# Altium PCB 74HC595_update.PcbDoc (part 1 of 2)
Units mil, origin at the board's own origin, x right, y up, seen from the top; angles counter-clockwise.
Board outline 2530 x 3200 mil, 2 copper layers (Top Layer, Bottom Layer); 370 components, 74 nets, 1020 pads, 340 vias.
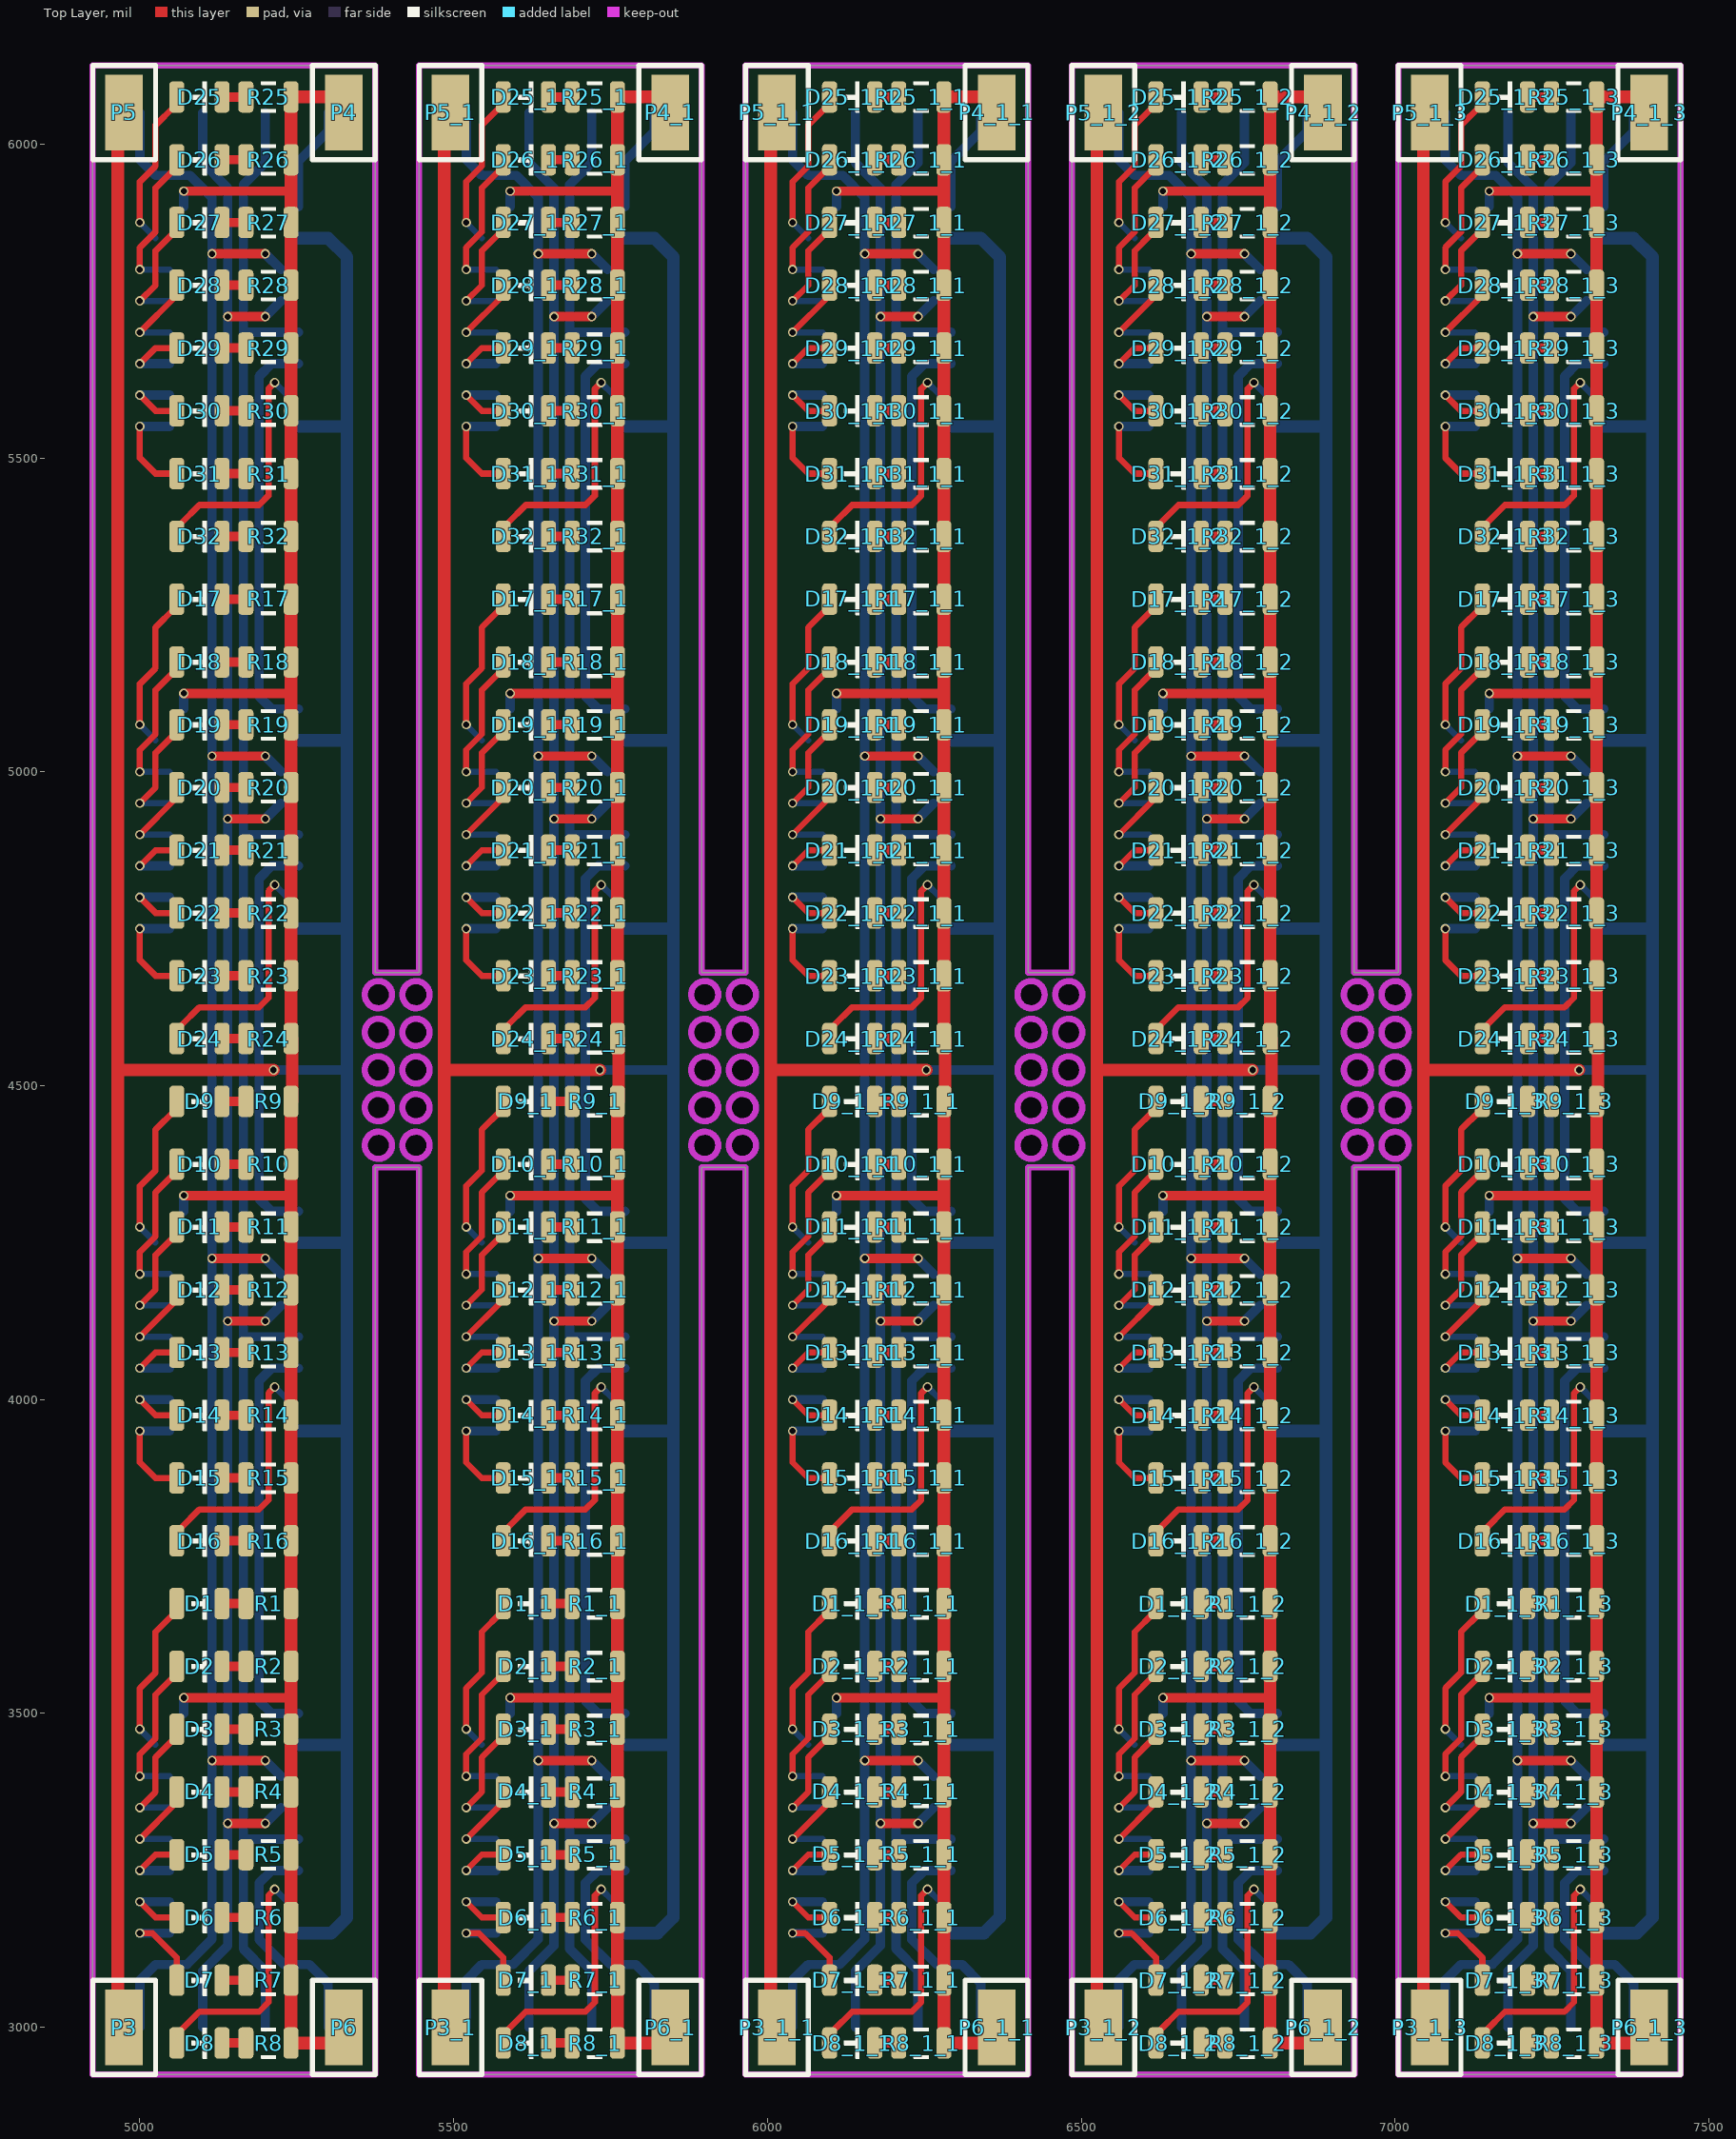
[diagram p0: Top Layer view]
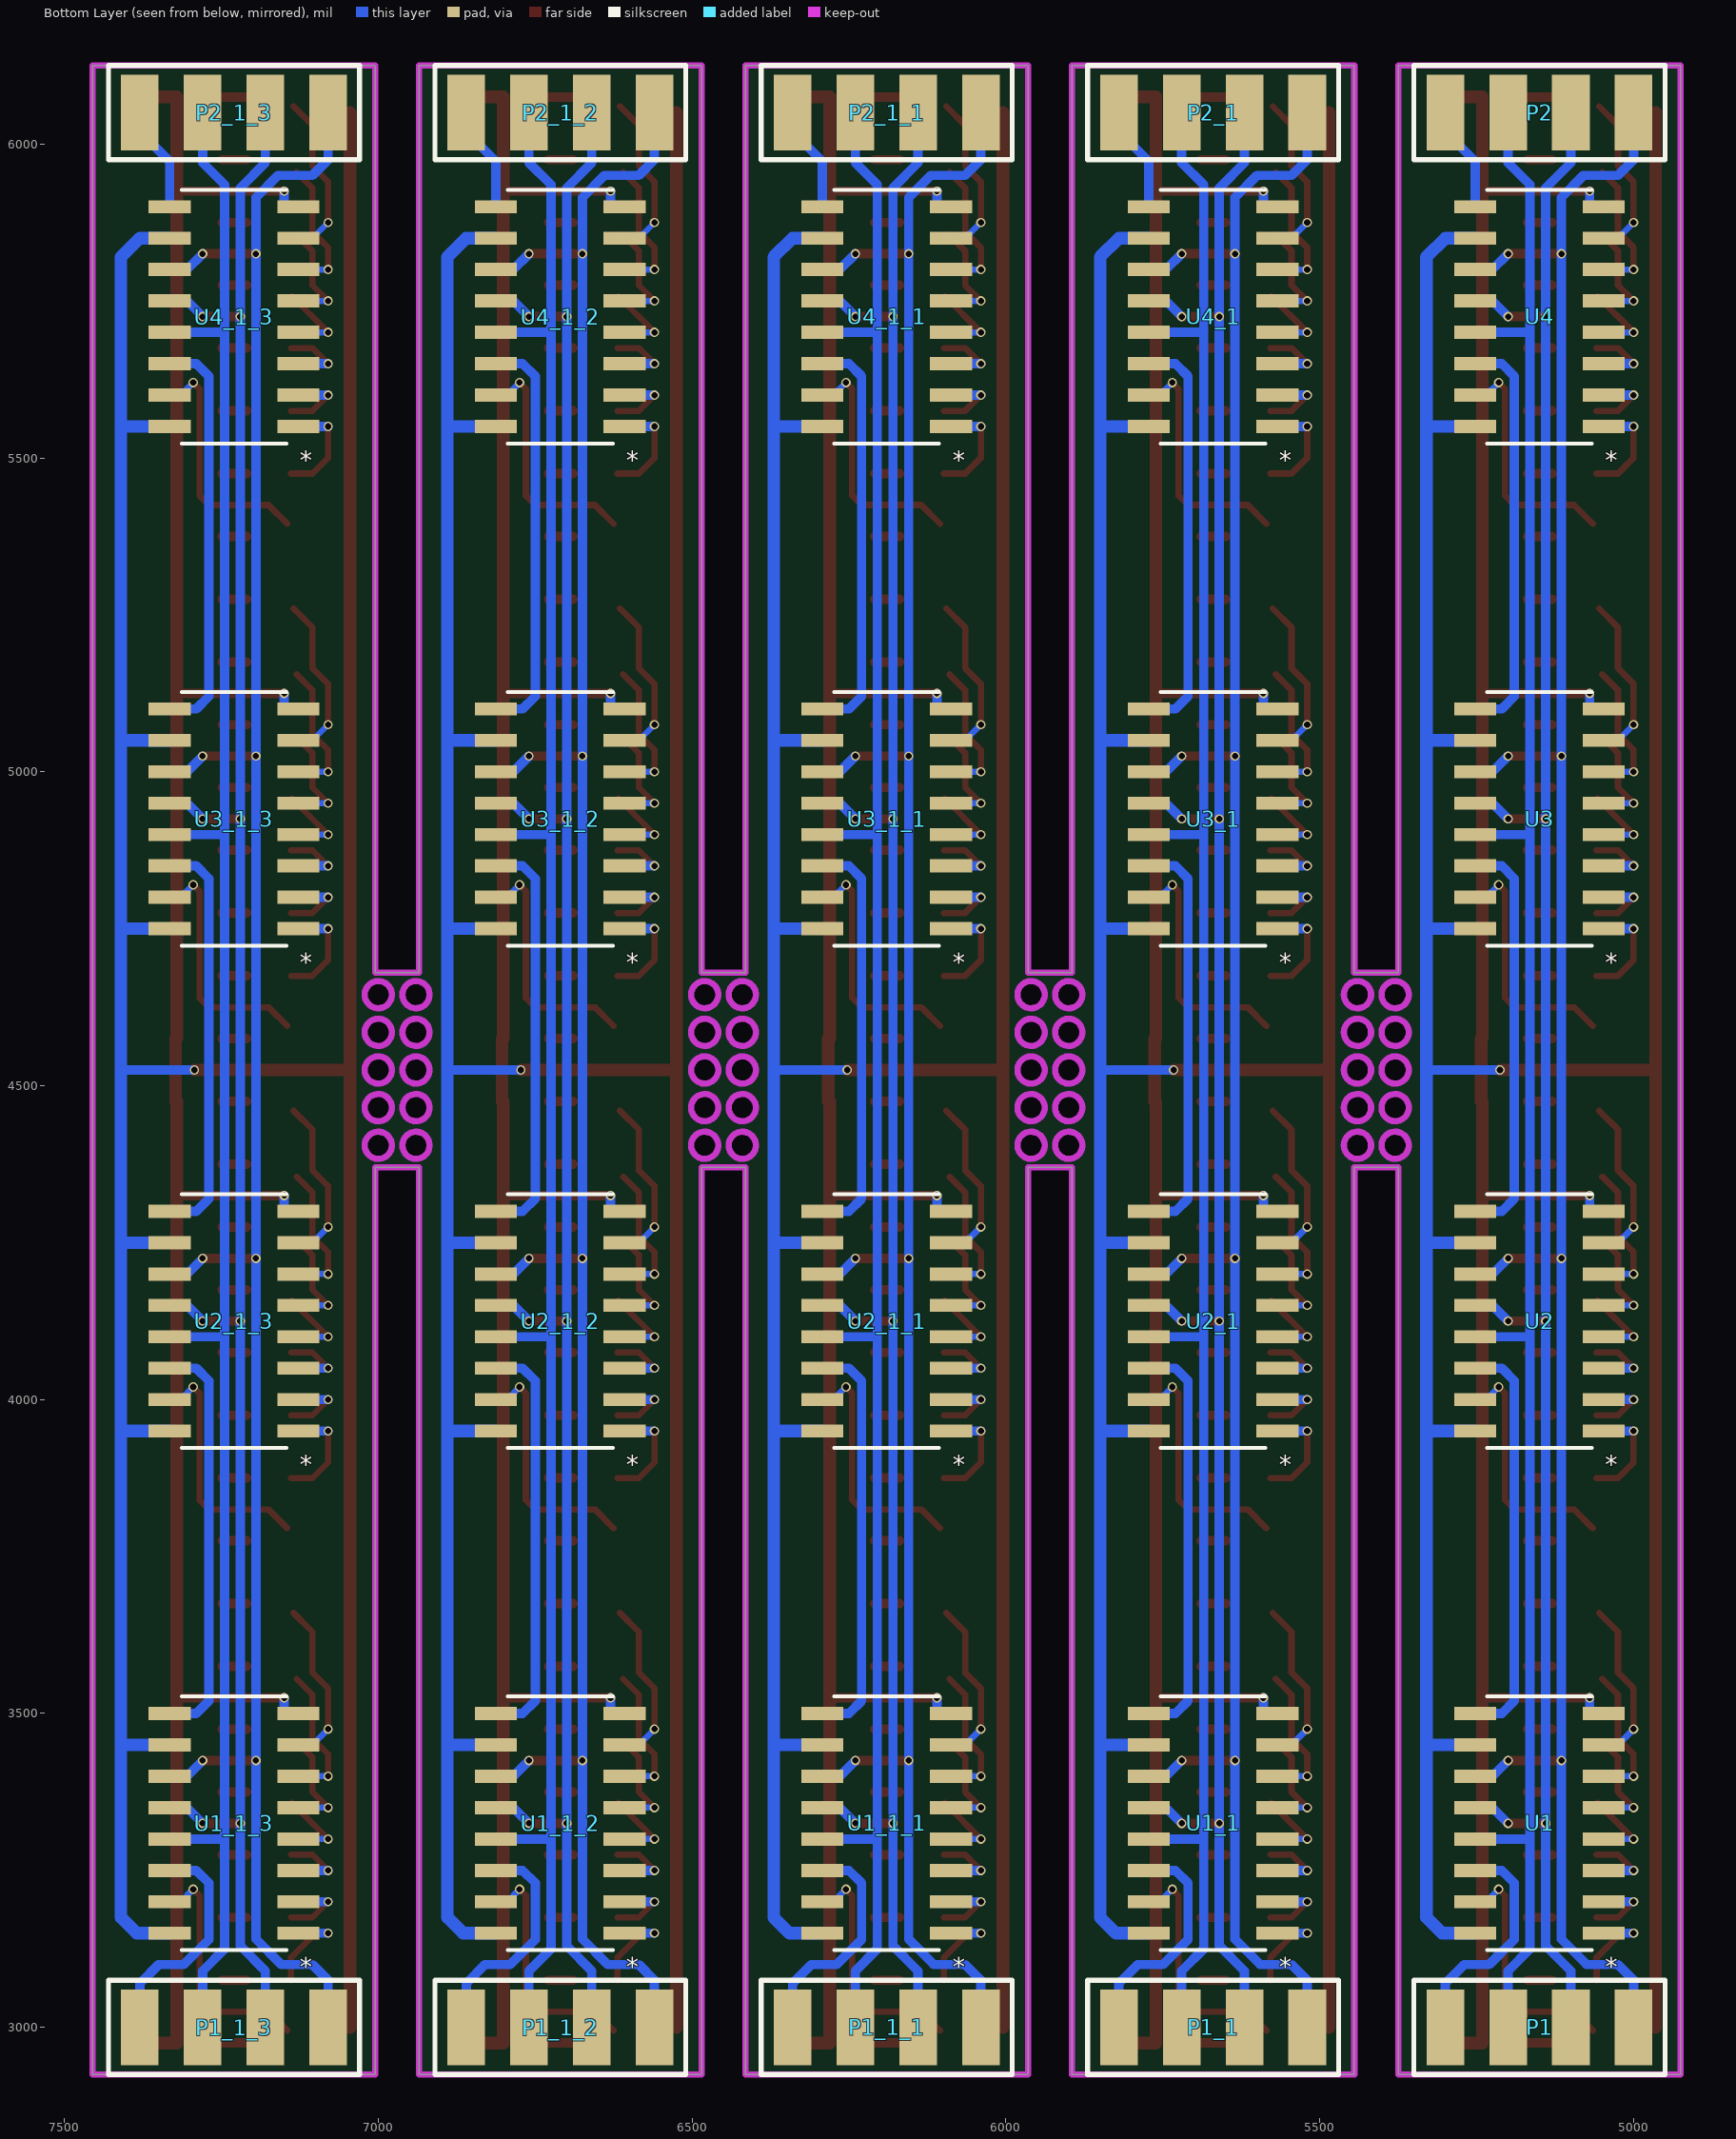
[diagram p1: Bottom Layer view, seen from below]
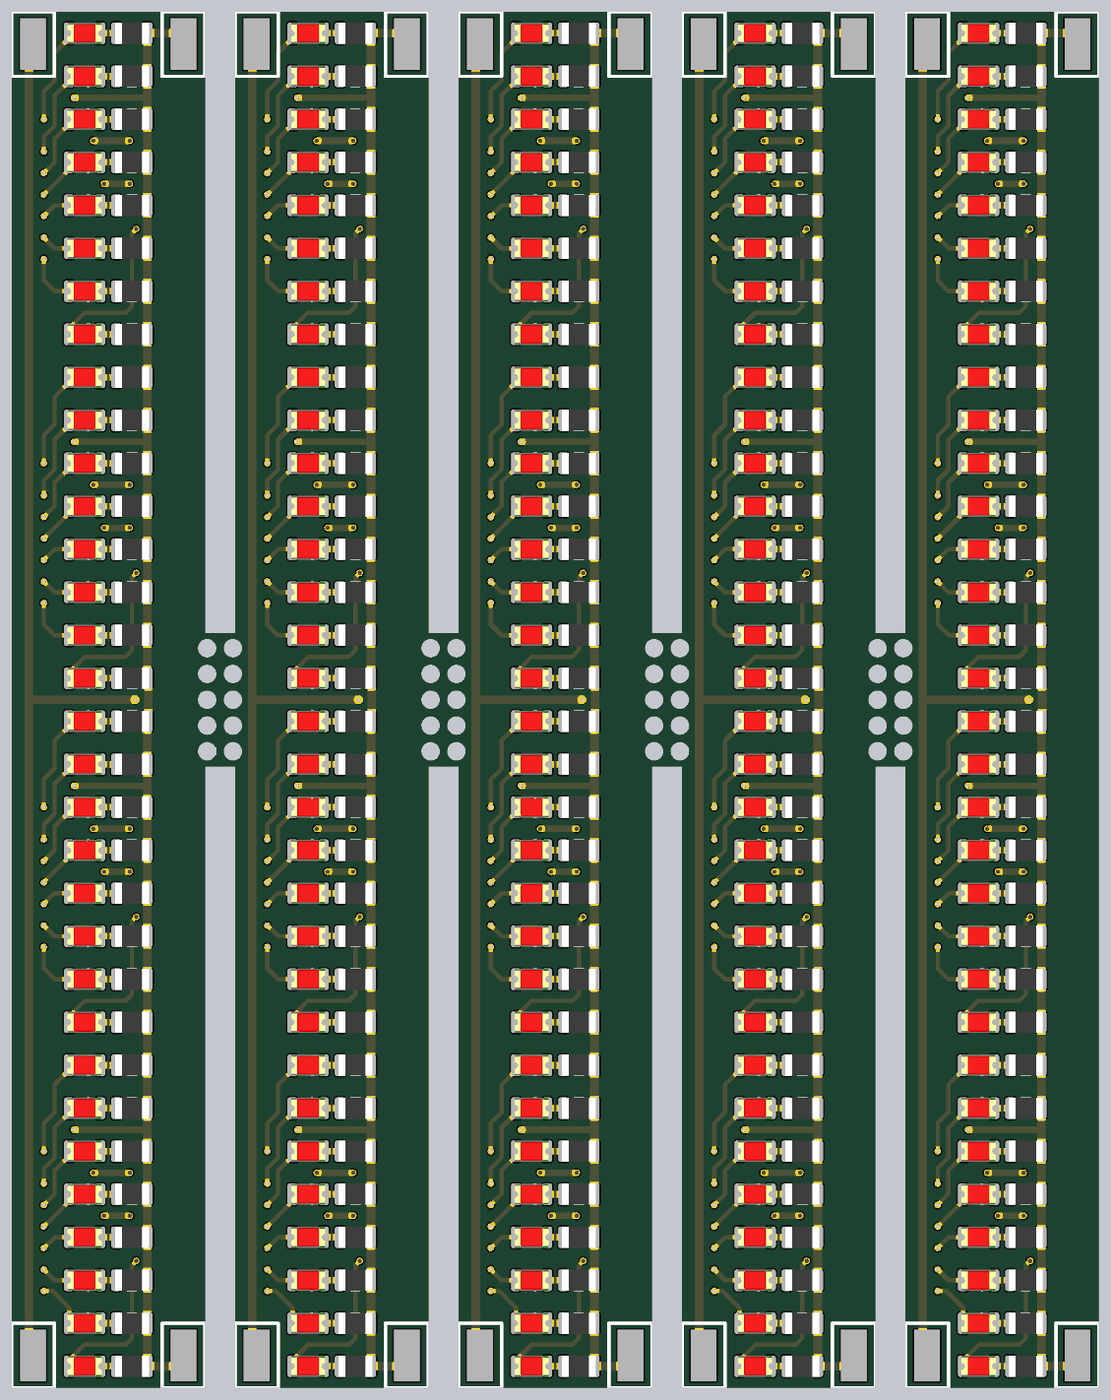
[diagram p3: 3D render of the assembled board from above, using the file's embedded part models]
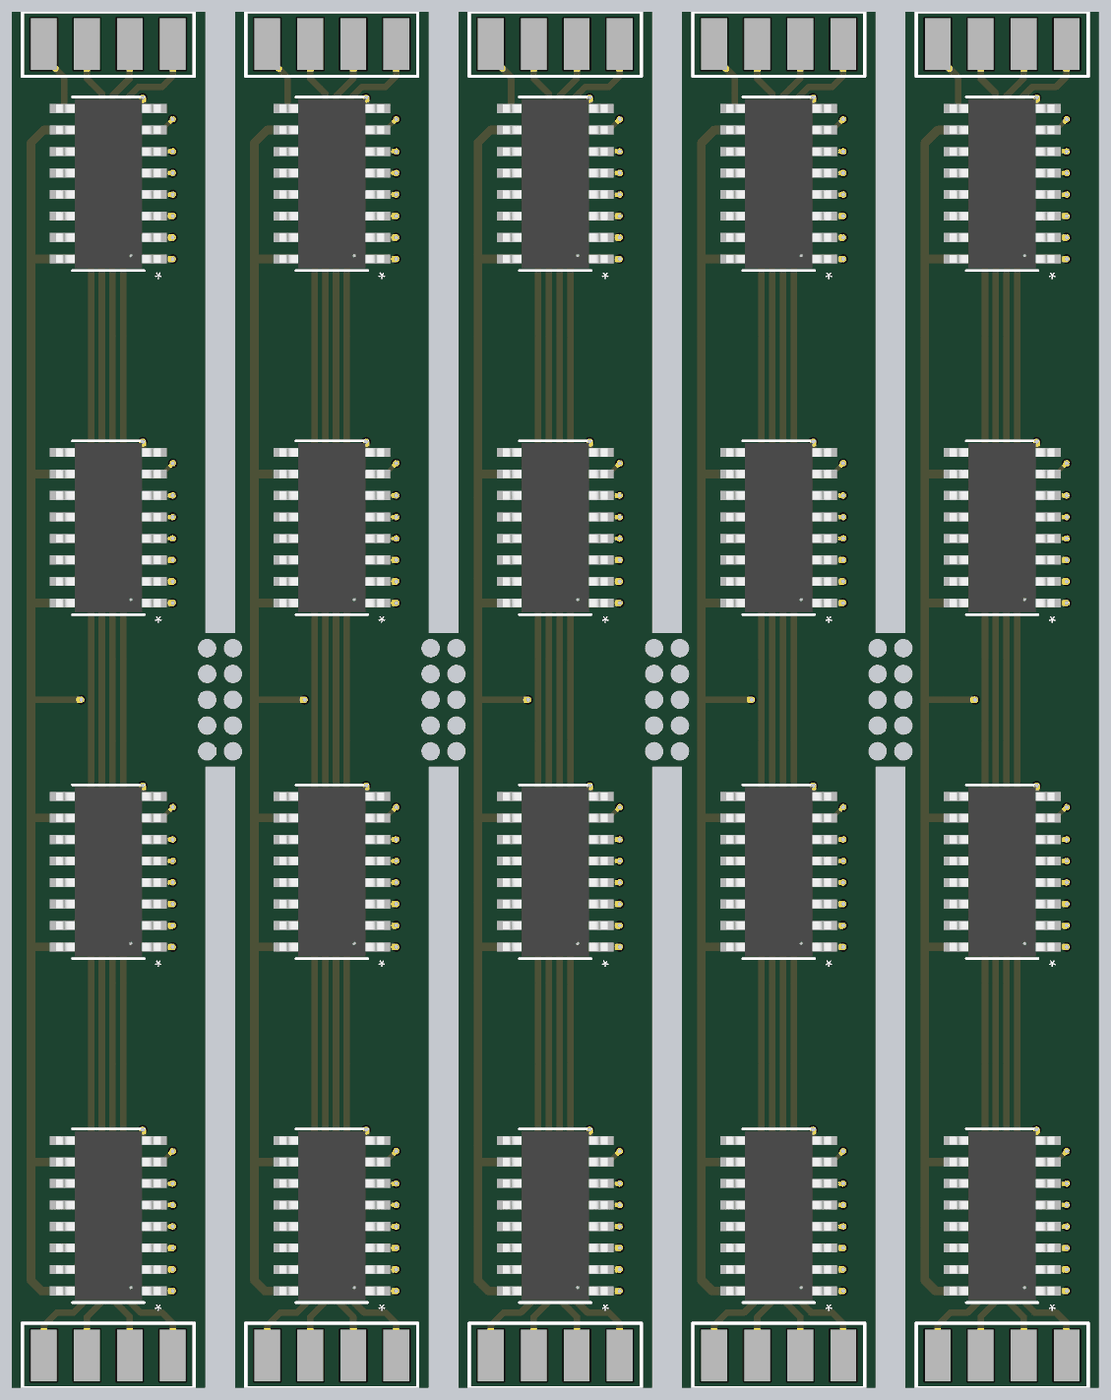
[diagram p4: 3D render of the assembled board from below, using the file's embedded part models]

## Layer stack, top to bottom
Top Solder: solder mask 0.4, Solder Resist, Dk 3.5
Top Layer: signal copper 1.4
Dielectric 1: dielectric 12.6, FR-4, Dk 4.8
Bottom Layer: signal copper 1.4
Bottom Solder: solder mask 0.4, Solder Resist, Dk 3.5

## Board outline
4925,2925 5375,2925 5375,4370 5445,4370 5445,2925 5895,2925 5895,4370 5965,4370 5965,2925 6415,2925 6415,4370 6485,4370 6485,2925 6935,2925 6935,4370 7005,4370 7005,2925 7455,2925 7455,6125 7005,6125 7005,4680 6935,4680 6935,6125 6485,6125 6485,4680 6415,4680 6415,6125 5965,6125 5965,4680 5895,4680 5895,6125 5445,6125 5445,4680 5375,4680 5375,6125 4925,6125
cut-out: 6918.35,4405 ccw(c6940,4405) 6940,4383.35 ccw(c6940,4405) 6961.65,4405 ccw(c6940,4405) 6940,4426.65 ccw(c6940,4405)
cut-out: 6918.35,4465 ccw(c6940,4465) 6940,4443.35 ccw(c6940,4465) 6961.65,4465 ccw(c6940,4465) 6940,4486.65 ccw(c6940,4465)
cut-out: 6918.35,4525 ccw(c6940,4525) 6940,4503.35 ccw(c6940,4525) 6961.65,4525 ccw(c6940,4525) 6940,4546.65 ccw(c6940,4525)
cut-out: 6918.35,4585 ccw(c6940,4585) 6940,4563.35 ccw(c6940,4585) 6961.65,4585 ccw(c6940,4585) 6940,4606.65 ccw(c6940,4585)
cut-out: 6918.35,4645 ccw(c6940,4645) 6940,4623.35 ccw(c6940,4645) 6961.65,4645 ccw(c6940,4645) 6940,4666.65 ccw(c6940,4645)
cut-out: 6398.35,4405 ccw(c6420,4405) 6420,4383.35 ccw(c6420,4405) 6441.65,4405 ccw(c6420,4405) 6420,4426.65 ccw(c6420,4405)
cut-out: 6398.35,4465 ccw(c6420,4465) 6420,4443.35 ccw(c6420,4465) 6441.65,4465 ccw(c6420,4465) 6420,4486.65 ccw(c6420,4465)
cut-out: 6398.35,4525 ccw(c6420,4525) 6420,4503.35 ccw(c6420,4525) 6441.65,4525 ccw(c6420,4525) 6420,4546.65 ccw(c6420,4525)
cut-out: 6398.35,4585 ccw(c6420,4585) 6420,4563.35 ccw(c6420,4585) 6441.65,4585 ccw(c6420,4585) 6420,4606.65 ccw(c6420,4585)
cut-out: 6398.35,4645 ccw(c6420,4645) 6420,4623.35 ccw(c6420,4645) 6441.65,4645 ccw(c6420,4645) 6420,4666.65 ccw(c6420,4645)
cut-out: 5878.35,4405 ccw(c5900,4405) 5900,4383.35 ccw(c5900,4405) 5921.65,4405 ccw(c5900,4405) 5900,4426.65 ccw(c5900,4405)
cut-out: 5878.35,4465 ccw(c5900,4465) 5900,4443.35 ccw(c5900,4465) 5921.65,4465 ccw(c5900,4465) 5900,4486.65 ccw(c5900,4465)
cut-out: 5878.35,4525 ccw(c5900,4525) 5900,4503.35 ccw(c5900,4525) 5921.65,4525 ccw(c5900,4525) 5900,4546.65 ccw(c5900,4525)
cut-out: 5878.35,4585 ccw(c5900,4585) 5900,4563.35 ccw(c5900,4585) 5921.65,4585 ccw(c5900,4585) 5900,4606.65 ccw(c5900,4585)
cut-out: 5878.35,4645 ccw(c5900,4645) 5900,4623.35 ccw(c5900,4645) 5921.65,4645 ccw(c5900,4645) 5900,4666.65 ccw(c5900,4645)
cut-out: 6978.35,4645 ccw(c7000,4645) 7000,4623.35 ccw(c7000,4645) 7021.65,4645 ccw(c7000,4645) 7000,4666.65 ccw(c7000,4645)
cut-out: 6978.35,4585 ccw(c7000,4585) 7000,4563.35 ccw(c7000,4585) 7021.65,4585 ccw(c7000,4585) 7000,4606.65 ccw(c7000,4585)
cut-out: 6978.35,4525 ccw(c7000,4525) 7000,4503.35 ccw(c7000,4525) 7021.65,4525 ccw(c7000,4525) 7000,4546.65 ccw(c7000,4525)
cut-out: 6978.35,4465 ccw(c7000,4465) 7000,4443.35 ccw(c7000,4465) 7021.65,4465 ccw(c7000,4465) 7000,4486.65 ccw(c7000,4465)
cut-out: 6978.35,4405 ccw(c7000,4405) 7000,4383.35 ccw(c7000,4405) 7021.65,4405 ccw(c7000,4405) 7000,4426.65 ccw(c7000,4405)
cut-out: 6458.35,4645 ccw(c6480,4645) 6480,4623.35 ccw(c6480,4645) 6501.65,4645 ccw(c6480,4645) 6480,4666.65 ccw(c6480,4645)
cut-out: 6458.35,4585 ccw(c6480,4585) 6480,4563.35 ccw(c6480,4585) 6501.65,4585 ccw(c6480,4585) 6480,4606.65 ccw(c6480,4585)
cut-out: 6458.35,4525 ccw(c6480,4525) 6480,4503.35 ccw(c6480,4525) 6501.65,4525 ccw(c6480,4525) 6480,4546.65 ccw(c6480,4525)
cut-out: 6458.35,4465 ccw(c6480,4465) 6480,4443.35 ccw(c6480,4465) 6501.65,4465 ccw(c6480,4465) 6480,4486.65 ccw(c6480,4465)
cut-out: 6458.35,4405 ccw(c6480,4405) 6480,4383.35 ccw(c6480,4405) 6501.65,4405 ccw(c6480,4405) 6480,4426.65 ccw(c6480,4405)
cut-out: 5938.35,4645 ccw(c5960,4645) 5960,4623.35 ccw(c5960,4645) 5981.65,4645 ccw(c5960,4645) 5960,4666.65 ccw(c5960,4645)
cut-out: 5938.35,4585 ccw(c5960,4585) 5960,4563.35 ccw(c5960,4585) 5981.65,4585 ccw(c5960,4585) 5960,4606.65 ccw(c5960,4585)
cut-out: 5938.35,4525 ccw(c5960,4525) 5960,4503.35 ccw(c5960,4525) 5981.65,4525 ccw(c5960,4525) 5960,4546.65 ccw(c5960,4525)
cut-out: 5938.35,4465 ccw(c5960,4465) 5960,4443.35 ccw(c5960,4465) 5981.65,4465 ccw(c5960,4465) 5960,4486.65 ccw(c5960,4465)
cut-out: 5938.35,4405 ccw(c5960,4405) 5960,4383.35 ccw(c5960,4405) 5981.65,4405 ccw(c5960,4405) 5960,4426.65 ccw(c5960,4405)
cut-out: 5418.35,4405 ccw(c5440,4405) 5440,4383.35 ccw(c5440,4405) 5461.65,4405 ccw(c5440,4405) 5440,4426.65 ccw(c5440,4405)
cut-out: 5418.35,4465 ccw(c5440,4465) 5440,4443.35 ccw(c5440,4465) 5461.65,4465 ccw(c5440,4465) 5440,4486.65 ccw(c5440,4465)
cut-out: 5418.35,4525 ccw(c5440,4525) 5440,4503.35 ccw(c5440,4525) 5461.65,4525 ccw(c5440,4525) 5440,4546.65 ccw(c5440,4525)
cut-out: 5418.35,4585 ccw(c5440,4585) 5440,4563.35 ccw(c5440,4585) 5461.65,4585 ccw(c5440,4585) 5440,4606.65 ccw(c5440,4585)
cut-out: 5418.35,4645 ccw(c5440,4645) 5440,4623.35 ccw(c5440,4645) 5461.65,4645 ccw(c5440,4645) 5440,4666.65 ccw(c5440,4645)
cut-out: 5358.35,4405 ccw(c5380,4405) 5380,4383.35 ccw(c5380,4405) 5401.65,4405 ccw(c5380,4405) 5380,4426.65 ccw(c5380,4405)
cut-out: 5358.35,4465 ccw(c5380,4465) 5380,4443.35 ccw(c5380,4465) 5401.65,4465 ccw(c5380,4465) 5380,4486.65 ccw(c5380,4465)
cut-out: 5358.35,4525 ccw(c5380,4525) 5380,4503.35 ccw(c5380,4525) 5401.65,4525 ccw(c5380,4525) 5380,4546.65 ccw(c5380,4525)
cut-out: 5358.35,4585 ccw(c5380,4585) 5380,4563.35 ccw(c5380,4585) 5401.65,4585 ccw(c5380,4585) 5380,4606.65 ccw(c5380,4585)
cut-out: 5358.35,4645 ccw(c5380,4645) 5380,4623.35 ccw(c5380,4645) 5401.65,4645 ccw(c5380,4645) 5380,4666.65 ccw(c5380,4645)

## Design rules (kind name [scope] priority, off if disabled: settings)
Clearance [All] p1: gap=8
PolygonConnect [All] p1: connectstyle=Relief reliefconductorwidth=10 reliefentries=4 polygonreliefangle="90 Angle" airgapwidth=10
RoutingVias [All] p1: holewidth=10 width=15 viastyle="Through Hole" minholewidth=8 minwidth=10 maxholewidth=50 maxwidth=60
SolderMaskExpansion [All] p1: expansion=4
Width [All] p1: maxlimit=50 minlimit=10 preferedwidth=15
30 further rules are at their usual default settings.

## Components (designator, comment, footprint, x,y, rotation, side; value= is the part's Value field where it differs from the comment)
D1 "color?" LED_0805_RED 5095,3675 r180 top
D1_1 "color?" LED_0805_RED 5615,3675 r180 top (schematic designator D1)
D1_1_1 "color?" LED_0805_RED 6135,3675 r180 top (schematic designator D1)
D1_1_2 "color?" LED_0805_RED 6655,3675 r180 top (schematic designator D1)
D1_1_3 "color?" LED_0805_RED 7175,3675 r180 top (schematic designator D1)
D2 "color?" LED_0805_RED 5095,3575 r180 top
D2_1 "color?" LED_0805_RED 5615,3575 r180 top (schematic designator D2)
D2_1_1 "color?" LED_0805_RED 6135,3575 r180 top (schematic designator D2)
D2_1_2 "color?" LED_0805_RED 6655,3575 r180 top (schematic designator D2)
D2_1_3 "color?" LED_0805_RED 7175,3575 r180 top (schematic designator D2)
D3 "color?" LED_0805_RED 5095,3475 r180 top
D3_1 "color?" LED_0805_RED 5615,3475 r180 top (schematic designator D3)
D3_1_1 "color?" LED_0805_RED 6135,3475 r180 top (schematic designator D3)
D3_1_2 "color?" LED_0805_RED 6655,3475 r180 top (schematic designator D3)
D3_1_3 "color?" LED_0805_RED 7175,3475 r180 top (schematic designator D3)
D4 "color?" LED_0805_RED 5095,3375 r180 top
D4_1 "color?" LED_0805_RED 5615,3375 r180 top (schematic designator D4)
D4_1_1 "color?" LED_0805_RED 6135,3375 r180 top (schematic designator D4)
D4_1_2 "color?" LED_0805_RED 6655,3375 r180 top (schematic designator D4)
D4_1_3 "color?" LED_0805_RED 7175,3375 r180 top (schematic designator D4)
D5 "color?" LED_0805_RED 5095,3275 r180 top
D5_1 "color?" LED_0805_RED 5615,3275 r180 top (schematic designator D5)
D5_1_1 "color?" LED_0805_RED 6135,3275 r180 top (schematic designator D5)
D5_1_2 "color?" LED_0805_RED 6655,3275 r180 top (schematic designator D5)
D5_1_3 "color?" LED_0805_RED 7175,3275 r180 top (schematic designator D5)
D6 "color?" LED_0805_RED 5095,3175 r180 top
D6_1 "color?" LED_0805_RED 5615,3175 r180 top (schematic designator D6)
D6_1_1 "color?" LED_0805_RED 6135,3175 r180 top (schematic designator D6)
D6_1_2 "color?" LED_0805_RED 6655,3175 r180 top (schematic designator D6)
D6_1_3 "color?" LED_0805_RED 7175,3175 r180 top (schematic designator D6)
D7 "color?" LED_0805_RED 5095,3075 r180 top
D7_1 "color?" LED_0805_RED 5615,3075 r180 top (schematic designator D7)
D7_1_1 "color?" LED_0805_RED 6135,3075 r180 top (schematic designator D7)
D7_1_2 "color?" LED_0805_RED 6655,3075 r180 top (schematic designator D7)
D7_1_3 "color?" LED_0805_RED 7175,3075 r180 top (schematic designator D7)
D8 "color?" LED_0805_RED 5095,2975 r180 top
D8_1 "color?" LED_0805_RED 5615,2975 r180 top (schematic designator D8)
D8_1_1 "color?" LED_0805_RED 6135,2975 r180 top (schematic designator D8)
D8_1_2 "color?" LED_0805_RED 6655,2975 r180 top (schematic designator D8)
D8_1_3 "color?" LED_0805_RED 7175,2975 r180 top (schematic designator D8)
D9 "color?" LED_0805_RED 5095,4475 r180 top
D9_1 "color?" LED_0805_RED 5615,4475 r180 top (schematic designator D9)
D9_1_1 "color?" LED_0805_RED 6135,4475 r180 top (schematic designator D9)
D9_1_2 "color?" LED_0805_RED 6655,4475 r180 top (schematic designator D9)
D9_1_3 "color?" LED_0805_RED 7175,4475 r180 top (schematic designator D9)
D10 "color?" LED_0805_RED 5095,4375 r180 top
D10_1 "color?" LED_0805_RED 5615,4375 r180 top (schematic designator D10)
D10_1_1 "color?" LED_0805_RED 6135,4375 r180 top (schematic designator D10)
D10_1_2 "color?" LED_0805_RED 6655,4375 r180 top (schematic designator D10)
D10_1_3 "color?" LED_0805_RED 7175,4375 r180 top (schematic designator D10)
D11 "color?" LED_0805_RED 5095,4275 r180 top
D11_1 "color?" LED_0805_RED 5615,4275 r180 top (schematic designator D11)
D11_1_1 "color?" LED_0805_RED 6135,4275 r180 top (schematic designator D11)
D11_1_2 "color?" LED_0805_RED 6655,4275 r180 top (schematic designator D11)
D11_1_3 "color?" LED_0805_RED 7175,4275 r180 top (schematic designator D11)
D12 "color?" LED_0805_RED 5095,4175 r180 top
D12_1 "color?" LED_0805_RED 5615,4175 r180 top (schematic designator D12)
D12_1_1 "color?" LED_0805_RED 6135,4175 r180 top (schematic designator D12)
D12_1_2 "color?" LED_0805_RED 6655,4175 r180 top (schematic designator D12)
D12_1_3 "color?" LED_0805_RED 7175,4175 r180 top (schematic designator D12)
D13 "color?" LED_0805_RED 5095,4075 r180 top
D13_1 "color?" LED_0805_RED 5615,4075 r180 top (schematic designator D13)
D13_1_1 "color?" LED_0805_RED 6135,4075 r180 top (schematic designator D13)
D13_1_2 "color?" LED_0805_RED 6655,4075 r180 top (schematic designator D13)
D13_1_3 "color?" LED_0805_RED 7175,4075 r180 top (schematic designator D13)
D14 "color?" LED_0805_RED 5095,3975 r180 top
D14_1 "color?" LED_0805_RED 5615,3975 r180 top (schematic designator D14)
D14_1_1 "color?" LED_0805_RED 6135,3975 r180 top (schematic designator D14)
D14_1_2 "color?" LED_0805_RED 6655,3975 r180 top (schematic designator D14)
D14_1_3 "color?" LED_0805_RED 7175,3975 r180 top (schematic designator D14)
D15 "color?" LED_0805_RED 5095,3875 r180 top
D15_1 "color?" LED_0805_RED 5615,3875 r180 top (schematic designator D15)
D15_1_1 "color?" LED_0805_RED 6135,3875 r180 top (schematic designator D15)
D15_1_2 "color?" LED_0805_RED 6655,3875 r180 top (schematic designator D15)
D15_1_3 "color?" LED_0805_RED 7175,3875 r180 top (schematic designator D15)
D16 "color?" LED_0805_RED 5095,3775 r180 top
D16_1 "color?" LED_0805_RED 5615,3775 r180 top (schematic designator D16)
D16_1_1 "color?" LED_0805_RED 6135,3775 r180 top (schematic designator D16)
D16_1_2 "color?" LED_0805_RED 6655,3775 r180 top (schematic designator D16)
D16_1_3 "color?" LED_0805_RED 7175,3775 r180 top (schematic designator D16)
D17 "color?" LED_0805_RED 5095,5275 r180 top
D17_1 "color?" LED_0805_RED 5615,5275 r180 top (schematic designator D17)
D17_1_1 "color?" LED_0805_RED 6135,5275 r180 top (schematic designator D17)
D17_1_2 "color?" LED_0805_RED 6655,5275 r180 top (schematic designator D17)
D17_1_3 "color?" LED_0805_RED 7175,5275 r180 top (schematic designator D17)
D18 "color?" LED_0805_RED 5095,5175 r180 top
D18_1 "color?" LED_0805_RED 5615,5175 r180 top (schematic designator D18)
D18_1_1 "color?" LED_0805_RED 6135,5175 r180 top (schematic designator D18)
D18_1_2 "color?" LED_0805_RED 6655,5175 r180 top (schematic designator D18)
D18_1_3 "color?" LED_0805_RED 7175,5175 r180 top (schematic designator D18)
D19 "color?" LED_0805_RED 5095,5075 r180 top
D19_1 "color?" LED_0805_RED 5615,5075 r180 top (schematic designator D19)
D19_1_1 "color?" LED_0805_RED 6135,5075 r180 top (schematic designator D19)
D19_1_2 "color?" LED_0805_RED 6655,5075 r180 top (schematic designator D19)
D19_1_3 "color?" LED_0805_RED 7175,5075 r180 top (schematic designator D19)
D20 "color?" LED_0805_RED 5095,4975 r180 top
D20_1 "color?" LED_0805_RED 5615,4975 r180 top (schematic designator D20)
D20_1_1 "color?" LED_0805_RED 6135,4975 r180 top (schematic designator D20)
D20_1_2 "color?" LED_0805_RED 6655,4975 r180 top (schematic designator D20)
D20_1_3 "color?" LED_0805_RED 7175,4975 r180 top (schematic designator D20)
D21 "color?" LED_0805_RED 5095,4875 r180 top
D21_1 "color?" LED_0805_RED 5615,4875 r180 top (schematic designator D21)
D21_1_1 "color?" LED_0805_RED 6135,4875 r180 top (schematic designator D21)
D21_1_2 "color?" LED_0805_RED 6655,4875 r180 top (schematic designator D21)
D21_1_3 "color?" LED_0805_RED 7175,4875 r180 top (schematic designator D21)
D22 "color?" LED_0805_RED 5095,4775 r180 top
D22_1 "color?" LED_0805_RED 5615,4775 r180 top (schematic designator D22)
D22_1_1 "color?" LED_0805_RED 6135,4775 r180 top (schematic designator D22)
D22_1_2 "color?" LED_0805_RED 6655,4775 r180 top (schematic designator D22)
D22_1_3 "color?" LED_0805_RED 7175,4775 r180 top (schematic designator D22)
D23 "color?" LED_0805_RED 5095,4675 r180 top
D23_1 "color?" LED_0805_RED 5615,4675 r180 top (schematic designator D23)
D23_1_1 "color?" LED_0805_RED 6135,4675 r180 top (schematic designator D23)
D23_1_2 "color?" LED_0805_RED 6655,4675 r180 top (schematic designator D23)
D23_1_3 "color?" LED_0805_RED 7175,4675 r180 top (schematic designator D23)
D24 "color?" LED_0805_RED 5095,4575 r180 top
D24_1 "color?" LED_0805_RED 5615,4575 r180 top (schematic designator D24)
D24_1_1 "color?" LED_0805_RED 6135,4575 r180 top (schematic designator D24)
D24_1_2 "color?" LED_0805_RED 6655,4575 r180 top (schematic designator D24)
D24_1_3 "color?" LED_0805_RED 7175,4575 r180 top (schematic designator D24)
D25 "color?" LED_0805_RED 5095,6075 r180 top
D25_1 "color?" LED_0805_RED 5615,6075 r180 top (schematic designator D25)
D25_1_1 "color?" LED_0805_RED 6135,6075 r180 top (schematic designator D25)
D25_1_2 "color?" LED_0805_RED 6655,6075 r180 top (schematic designator D25)
D25_1_3 "color?" LED_0805_RED 7175,6075 r180 top (schematic designator D25)
D26 "color?" LED_0805_RED 5095,5975 r180 top
D26_1 "color?" LED_0805_RED 5615,5975 r180 top (schematic designator D26)
D26_1_1 "color?" LED_0805_RED 6135,5975 r180 top (schematic designator D26)
D26_1_2 "color?" LED_0805_RED 6655,5975 r180 top (schematic designator D26)
D26_1_3 "color?" LED_0805_RED 7175,5975 r180 top (schematic designator D26)
D27 "color?" LED_0805_RED 5095,5875 r180 top
D27_1 "color?" LED_0805_RED 5615,5875 r180 top (schematic designator D27)
D27_1_1 "color?" LED_0805_RED 6135,5875 r180 top (schematic designator D27)
D27_1_2 "color?" LED_0805_RED 6655,5875 r180 top (schematic designator D27)
D27_1_3 "color?" LED_0805_RED 7175,5875 r180 top (schematic designator D27)
D28 "color?" LED_0805_RED 5095,5775 r180 top
D28_1 "color?" LED_0805_RED 5615,5775 r180 top (schematic designator D28)
D28_1_1 "color?" LED_0805_RED 6135,5775 r180 top (schematic designator D28)
D28_1_2 "color?" LED_0805_RED 6655,5775 r180 top (schematic designator D28)
D28_1_3 "color?" LED_0805_RED 7175,5775 r180 top (schematic designator D28)
D29 "color?" LED_0805_RED 5095,5675 r180 top
D29_1 "color?" LED_0805_RED 5615,5675 r180 top (schematic designator D29)
D29_1_1 "color?" LED_0805_RED 6135,5675 r180 top (schematic designator D29)
D29_1_2 "color?" LED_0805_RED 6655,5675 r180 top (schematic designator D29)
D29_1_3 "color?" LED_0805_RED 7175,5675 r180 top (schematic designator D29)
D30 "color?" LED_0805_RED 5095,5575 r180 top
D30_1 "color?" LED_0805_RED 5615,5575 r180 top (schematic designator D30)
D30_1_1 "color?" LED_0805_RED 6135,5575 r180 top (schematic designator D30)
D30_1_2 "color?" LED_0805_RED 6655,5575 r180 top (schematic designator D30)
D30_1_3 "color?" LED_0805_RED 7175,5575 r180 top (schematic designator D30)
D31 "color?" LED_0805_RED 5095,5475 r180 top
D31_1 "color?" LED_0805_RED 5615,5475 r180 top (schematic designator D31)
D31_1_1 "color?" LED_0805_RED 6135,5475 r180 top (schematic designator D31)
D31_1_2 "color?" LED_0805_RED 6655,5475 r180 top (schematic designator D31)
D31_1_3 "color?" LED_0805_RED 7175,5475 r180 top (schematic designator D31)
D32 "color?" LED_0805_RED 5095,5375 r180 top
D32_1 "color?" LED_0805_RED 5615,5375 r180 top (schematic designator D32)
D32_1_1 "color?" LED_0805_RED 6135,5375 r180 top (schematic designator D32)
D32_1_2 "color?" LED_0805_RED 6655,5375 r180 top (schematic designator D32)
D32_1_3 "color?" LED_0805_RED 7175,5375 r180 top (schematic designator D32)
P1 "Header 4" HDR1X4_SOP 5000,3000 r0 bottom locked
P1_1 "Header 4" HDR1X4_SOP 5520,3000 r0 bottom locked (schematic designator P1)
P1_1_1 "Header 4" HDR1X4_SOP 6040,3000 r0 bottom locked (schematic designator P1)
P1_1_2 "Header 4" HDR1X4_SOP 6560,3000 r0 bottom locked (schematic designator P1)
P1_1_3 "Header 4" HDR1X4_SOP 7080,3000 r0 bottom locked (schematic designator P1)
P2 "Header 4" HDR1X4_SOP 5000,6050 r0 bottom locked
P2_1 "Header 4" HDR1X4_SOP 5520,6050 r0 bottom locked (schematic designator P2)
P2_1_1 "Header 4" HDR1X4_SOP 6040,6050 r0 bottom locked (schematic designator P2)
P2_1_2 "Header 4" HDR1X4_SOP 6560,6050 r0 bottom locked (schematic designator P2)
P2_1_3 "Header 4" HDR1X4_SOP 7080,6050 r0 bottom locked (schematic designator P2)
P3 "Header 1" HDR1X1_SOP 4975,3000 r0 top locked
P3_1 "Header 1" HDR1X1_SOP 5495,3000 r0 top locked (schematic designator P3)
P3_1_1 "Header 1" HDR1X1_SOP 6015,3000 r0 top locked (schematic designator P3)
P3_1_2 "Header 1" HDR1X1_SOP 6535,3000 r0 top locked (schematic designator P3)
P3_1_3 "Header 1" HDR1X1_SOP 7055,3000 r0 top locked (schematic designator P3)
P4 "Header 1" HDR1X1_SOP 5325,6050 r0 top locked
P4_1 "Header 1" HDR1X1_SOP 5845,6050 r0 top locked (schematic designator P4)
P4_1_1 "Header 1" HDR1X1_SOP 6365,6050 r0 top locked (schematic designator P4)
P4_1_2 "Header 1" HDR1X1_SOP 6885,6050 r0 top locked (schematic designator P4)
P4_1_3 "Header 1" HDR1X1_SOP 7405,6050 r0 top locked (schematic designator P4)
P5 "Header 1" HDR1X1_SOP 4975,6050 r0 top locked
P5_1 "Header 1" HDR1X1_SOP 5495,6050 r0 top locked (schematic designator P5)
P5_1_1 "Header 1" HDR1X1_SOP 6015,6050 r0 top locked (schematic designator P5)
P5_1_2 "Header 1" HDR1X1_SOP 6535,6050 r0 top locked (schematic designator P5)
P5_1_3 "Header 1" HDR1X1_SOP 7055,6050 r0 top locked (schematic designator P5)
P6 "Header 1" HDR1X1_SOP 5325,3000 r0 top locked
P6_1 "Header 1" HDR1X1_SOP 5845,3000 r0 top locked (schematic designator P6)
P6_1_1 "Header 1" HDR1X1_SOP 6365,3000 r0 top locked (schematic designator P6)
P6_1_2 "Header 1" HDR1X1_SOP 6885,3000 r0 top locked (schematic designator P6)
P6_1_3 "Header 1" HDR1X1_SOP 7405,3000 r0 top locked (schematic designator P6)
R1 "R0805" RES_0805 5205,3675 r0 top
R1_1 "R0805" RES_0805 5725,3675 r0 top (schematic designator R1)
R1_1_1 "R0805" RES_0805 6245,3675 r0 top (schematic designator R1)
R1_1_2 "R0805" RES_0805 6765,3675 r0 top (schematic designator R1)
R1_1_3 "R0805" RES_0805 7285,3675 r0 top (schematic designator R1)
R2 "R0805" RES_0805 5205,3575 r0 top
R2_1 "R0805" RES_0805 5725,3575 r0 top (schematic designator R2)
R2_1_1 "R0805" RES_0805 6245,3575 r0 top (schematic designator R2)
R2_1_2 "R0805" RES_0805 6765,3575 r0 top (schematic designator R2)
R2_1_3 "R0805" RES_0805 7285,3575 r0 top (schematic designator R2)
R3 "R0805" RES_0805 5205,3475 r0 top
R3_1 "R0805" RES_0805 5725,3475 r0 top (schematic designator R3)
R3_1_1 "R0805" RES_0805 6245,3475 r0 top (schematic designator R3)
R3_1_2 "R0805" RES_0805 6765,3475 r0 top (schematic designator R3)
R3_1_3 "R0805" RES_0805 7285,3475 r0 top (schematic designator R3)
R4 "R0805" RES_0805 5205,3375 r0 top
R4_1 "R0805" RES_0805 5725,3375 r0 top (schematic designator R4)
R4_1_1 "R0805" RES_0805 6245,3375 r0 top (schematic designator R4)
R4_1_2 "R0805" RES_0805 6765,3375 r0 top (schematic designator R4)
R4_1_3 "R0805" RES_0805 7285,3375 r0 top (schematic designator R4)
R5 "R0805" RES_0805 5205,3275 r0 top
R5_1 "R0805" RES_0805 5725,3275 r0 top (schematic designator R5)
R5_1_1 "R0805" RES_0805 6245,3275 r0 top (schematic designator R5)
R5_1_2 "R0805" RES_0805 6765,3275 r0 top (schematic designator R5)
R5_1_3 "R0805" RES_0805 7285,3275 r0 top (schematic designator R5)
R6 "R0805" RES_0805 5205,3175 r0 top
R6_1 "R0805" RES_0805 5725,3175 r0 top (schematic designator R6)
R6_1_1 "R0805" RES_0805 6245,3175 r0 top (schematic designator R6)
R6_1_2 "R0805" RES_0805 6765,3175 r0 top (schematic designator R6)
R6_1_3 "R0805" RES_0805 7285,3175 r0 top (schematic designator R6)
R7 "R0805" RES_0805 5205,3075 r0 top
R7_1 "R0805" RES_0805 5725,3075 r0 top (schematic designator R7)
R7_1_1 "R0805" RES_0805 6245,3075 r0 top (schematic designator R7)
R7_1_2 "R0805" RES_0805 6765,3075 r0 top (schematic designator R7)
R7_1_3 "R0805" RES_0805 7285,3075 r0 top (schematic designator R7)
R8 "R0805" RES_0805 5205,2975 r0 top
R8_1 "R0805" RES_0805 5725,2975 r0 top (schematic designator R8)
R8_1_1 "R0805" RES_0805 6245,2975 r0 top (schematic designator R8)
R8_1_2 "R0805" RES_0805 6765,2975 r0 top (schematic designator R8)
R8_1_3 "R0805" RES_0805 7285,2975 r0 top (schematic designator R8)
R9 "R0805" RES_0805 5205,4475 r0 top
R9_1 "R0805" RES_0805 5725,4475 r0 top (schematic designator R9)
R9_1_1 "R0805" RES_0805 6245,4475 r0 top (schematic designator R9)
R9_1_2 "R0805" RES_0805 6765,4475 r0 top (schematic designator R9)
R9_1_3 "R0805" RES_0805 7285,4475 r0 top (schematic designator R9)
R10 "R0805" RES_0805 5205,4375 r0 top
R10_1 "R0805" RES_0805 5725,4375 r0 top (schematic designator R10)
R10_1_1 "R0805" RES_0805 6245,4375 r0 top (schematic designator R10)
R10_1_2 "R0805" RES_0805 6765,4375 r0 top (schematic designator R10)
R10_1_3 "R0805" RES_0805 7285,4375 r0 top (schematic designator R10)
R11 "R0805" RES_0805 5205,4275 r0 top
R11_1 "R0805" RES_0805 5725,4275 r0 top (schematic designator R11)
R11_1_1 "R0805" RES_0805 6245,4275 r0 top (schematic designator R11)
R11_1_2 "R0805" RES_0805 6765,4275 r0 top (schematic designator R11)
R11_1_3 "R0805" RES_0805 7285,4275 r0 top (schematic designator R11)
R12 "R0805" RES_0805 5205,4175 r0 top
R12_1 "R0805" RES_0805 5725,4175 r0 top (schematic designator R12)
R12_1_1 "R0805" RES_0805 6245,4175 r0 top (schematic designator R12)
R12_1_2 "R0805" RES_0805 6765,4175 r0 top (schematic designator R12)
R12_1_3 "R0805" RES_0805 7285,4175 r0 top (schematic designator R12)
R13 "R0805" RES_0805 5205,4075 r0 top
R13_1 "R0805" RES_0805 5725,4075 r0 top (schematic designator R13)
R13_1_1 "R0805" RES_0805 6245,4075 r0 top (schematic designator R13)
R13_1_2 "R0805" RES_0805 6765,4075 r0 top (schematic designator R13)
R13_1_3 "R0805" RES_0805 7285,4075 r0 top (schematic designator R13)
R14 "R0805" RES_0805 5205,3975 r0 top
R14_1 "R0805" RES_0805 5725,3975 r0 top (schematic designator R14)
R14_1_1 "R0805" RES_0805 6245,3975 r0 top (schematic designator R14)
R14_1_2 "R0805" RES_0805 6765,3975 r0 top (schematic designator R14)
R14_1_3 "R0805" RES_0805 7285,3975 r0 top (schematic designator R14)
R15 "R0805" RES_0805 5205,3875 r0 top
R15_1 "R0805" RES_0805 5725,3875 r0 top (schematic designator R15)
R15_1_1 "R0805" RES_0805 6245,3875 r0 top (schematic designator R15)
R15_1_2 "R0805" RES_0805 6765,3875 r0 top (schematic designator R15)
R15_1_3 "R0805" RES_0805 7285,3875 r0 top (schematic designator R15)
R16 "R0805" RES_0805 5205,3775 r0 top
R16_1 "R0805" RES_0805 5725,3775 r0 top (schematic designator R16)
R16_1_1 "R0805" RES_0805 6245,3775 r0 top (schematic designator R16)
R16_1_2 "R0805" RES_0805 6765,3775 r0 top (schematic designator R16)
R16_1_3 "R0805" RES_0805 7285,3775 r0 top (schematic designator R16)
R17 "R0805" RES_0805 5205,5275 r0 top
R17_1 "R0805" RES_0805 5725,5275 r0 top (schematic designator R17)
R17_1_1 "R0805" RES_0805 6245,5275 r0 top (schematic designator R17)
R17_1_2 "R0805" RES_0805 6765,5275 r0 top (schematic designator R17)
R17_1_3 "R0805" RES_0805 7285,5275 r0 top (schematic designator R17)
R18 "R0805" RES_0805 5205,5175 r0 top
R18_1 "R0805" RES_0805 5725,5175 r0 top (schematic designator R18)
R18_1_1 "R0805" RES_0805 6245,5175 r0 top (schematic designator R18)
R18_1_2 "R0805" RES_0805 6765,5175 r0 top (schematic designator R18)
R18_1_3 "R0805" RES_0805 7285,5175 r0 top (schematic designator R18)
R19 "R0805" RES_0805 5205,5075 r0 top
R19_1 "R0805" RES_0805 5725,5075 r0 top (schematic designator R19)
R19_1_1 "R0805" RES_0805 6245,5075 r0 top (schematic designator R19)
R19_1_2 "R0805" RES_0805 6765,5075 r0 top (schematic designator R19)
R19_1_3 "R0805" RES_0805 7285,5075 r0 top (schematic designator R19)
R20 "R0805" RES_0805 5205,4975 r0 top
R20_1 "R0805" RES_0805 5725,4975 r0 top (schematic designator R20)
R20_1_1 "R0805" RES_0805 6245,4975 r0 top (schematic designator R20)
R20_1_2 "R0805" RES_0805 6765,4975 r0 top (schematic designator R20)
R20_1_3 "R0805" RES_0805 7285,4975 r0 top (schematic designator R20)
R21 "R0805" RES_0805 5205,4875 r0 top
R21_1 "R0805" RES_0805 5725,4875 r0 top (schematic designator R21)
R21_1_1 "R0805" RES_0805 6245,4875 r0 top (schematic designator R21)
R21_1_2 "R0805" RES_0805 6765,4875 r0 top (schematic designator R21)
R21_1_3 "R0805" RES_0805 7285,4875 r0 top (schematic designator R21)
R22 "R0805" RES_0805 5205,4775 r0 top
R22_1 "R0805" RES_0805 5725,4775 r0 top (schematic designator R22)
R22_1_1 "R0805" RES_0805 6245,4775 r0 top (schematic designator R22)
R22_1_2 "R0805" RES_0805 6765,4775 r0 top (schematic designator R22)
R22_1_3 "R0805" RES_0805 7285,4775 r0 top (schematic designator R22)
R23 "R0805" RES_0805 5205,4675 r0 top
R23_1 "R0805" RES_0805 5725,4675 r0 top (schematic designator R23)
R23_1_1 "R0805" RES_0805 6245,4675 r0 top (schematic designator R23)
R23_1_2 "R0805" RES_0805 6765,4675 r0 top (schematic designator R23)
R23_1_3 "R0805" RES_0805 7285,4675 r0 top (schematic designator R23)
R24 "R0805" RES_0805 5205,4575 r0 top
R24_1 "R0805" RES_0805 5725,4575 r0 top (schematic designator R24)
R24_1_1 "R0805" RES_0805 6245,4575 r0 top (schematic designator R24)
R24_1_2 "R0805" RES_0805 6765,4575 r0 top (schematic designator R24)
R24_1_3 "R0805" RES_0805 7285,4575 r0 top (schematic designator R24)
R25 "R0805" RES_0805 5205,6075 r0 top
R25_1 "R0805" RES_0805 5725,6075 r0 top (schematic designator R25)
R25_1_1 "R0805" RES_0805 6245,6075 r0 top (schematic designator R25)
R25_1_2 "R0805" RES_0805 6765,6075 r0 top (schematic designator R25)
R25_1_3 "R0805" RES_0805 7285,6075 r0 top (schematic designator R25)
R26 "R0805" RES_0805 5205,5975 r0 top
R26_1 "R0805" RES_0805 5725,5975 r0 top (schematic designator R26)
R26_1_1 "R0805" RES_0805 6245,5975 r0 top (schematic designator R26)
R26_1_2 "R0805" RES_0805 6765,5975 r0 top (schematic designator R26)
R26_1_3 "R0805" RES_0805 7285,5975 r0 top (schematic designator R26)
R27 "R0805" RES_0805 5205,5875 r0 top
R27_1 "R0805" RES_0805 5725,5875 r0 top (schematic designator R27)
R27_1_1 "R0805" RES_0805 6245,5875 r0 top (schematic designator R27)
R27_1_2 "R0805" RES_0805 6765,5875 r0 top (schematic designator R27)
R27_1_3 "R0805" RES_0805 7285,5875 r0 top (schematic designator R27)
R28 "R0805" RES_0805 5205,5775 r0 top
R28_1 "R0805" RES_0805 5725,5775 r0 top (schematic designator R28)
R28_1_1 "R0805" RES_0805 6245,5775 r0 top (schematic designator R28)
R28_1_2 "R0805" RES_0805 6765,5775 r0 top (schematic designator R28)
R28_1_3 "R0805" RES_0805 7285,5775 r0 top (schematic designator R28)
R29 "R0805" RES_0805 5205,5675 r0 top
R29_1 "R0805" RES_0805 5725,5675 r0 top (schematic designator R29)
R29_1_1 "R0805" RES_0805 6245,5675 r0 top (schematic designator R29)
R29_1_2 "R0805" RES_0805 6765,5675 r0 top (schematic designator R29)
R29_1_3 "R0805" RES_0805 7285,5675 r0 top (schematic designator R29)
R30 "R0805" RES_0805 5205,5575 r0 top
R30_1 "R0805" RES_0805 5725,5575 r0 top (schematic designator R30)
R30_1_1 "R0805" RES_0805 6245,5575 r0 top (schematic designator R30)
R30_1_2 "R0805" RES_0805 6765,5575 r0 top (schematic designator R30)
R30_1_3 "R0805" RES_0805 7285,5575 r0 top (schematic designator R30)
R31 "R0805" RES_0805 5205,5475 r0 top
R31_1 "R0805" RES_0805 5725,5475 r0 top (schematic designator R31)
R31_1_1 "R0805" RES_0805 6245,5475 r0 top (schematic designator R31)
R31_1_2 "R0805" RES_0805 6765,5475 r0 top (schematic designator R31)
R31_1_3 "R0805" RES_0805 7285,5475 r0 top (schematic designator R31)
R32 "R0805" RES_0805 5205,5375 r0 top
R32_1 "R0805" RES_0805 5725,5375 r0 top (schematic designator R32)
R32_1_1 "R0805" RES_0805 6245,5375 r0 top (schematic designator R32)
R32_1_2 "R0805" RES_0805 6765,5375 r0 top (schematic designator R32)
R32_1_3 "R0805" RES_0805 7285,5375 r0 top (schematic designator R32)
U1 "74HC595D,112" SOT109-1_NEX 5150,3325 r0 bottom locked
U1_1 "74HC595D,112" SOT109-1_NEX 5670,3325 r0 bottom locked (schematic designator U1)
U1_1_1 "74HC595D,112" SOT109-1_NEX 6190,3325 r0 bottom locked (schematic designator U1)
U1_1_2 "74HC595D,112" SOT109-1_NEX 6710,3325 r0 bottom locked (schematic designator U1)
U1_1_3 "74HC595D,112" SOT109-1_NEX 7230,3325 r0 bottom locked (schematic designator U1)
U2 "74HC595D,112" SOT109-1_NEX 5150,4125 r0 bottom locked
U2_1 "74HC595D,112" SOT109-1_NEX 5670,4125 r0 bottom locked (schematic designator U2)
U2_1_1 "74HC595D,112" SOT109-1_NEX 6190,4125 r0 bottom locked (schematic designator U2)
U2_1_2 "74HC595D,112" SOT109-1_NEX 6710,4125 r0 bottom locked (schematic designator U2)
U2_1_3 "74HC595D,112" SOT109-1_NEX 7230,4125 r0 bottom locked (schematic designator U2)
U3 "74HC595D,112" SOT109-1_NEX 5150,4925 r0 bottom locked
U3_1 "74HC595D,112" SOT109-1_NEX 5670,4925 r0 bottom locked (schematic designator U3)
U3_1_1 "74HC595D,112" SOT109-1_NEX 6190,4925 r0 bottom locked (schematic designator U3)
U3_1_2 "74HC595D,112" SOT109-1_NEX 6710,4925 r0 bottom locked (schematic designator U3)
U3_1_3 "74HC595D,112" SOT109-1_NEX 7230,4925 r0 bottom locked (schematic designator U3)
U4 "74HC595D,112" SOT109-1_NEX 5150,5725 r0 bottom
U4_1 "74HC595D,112" SOT109-1_NEX 5670,5725 r0 bottom (schematic designator U4)
U4_1_1 "74HC595D,112" SOT109-1_NEX 6190,5725 r0 bottom (schematic designator U4)
U4_1_2 "74HC595D,112" SOT109-1_NEX 6710,5725 r0 bottom (schematic designator U4)
U4_1_3 "74HC595D,112" SOT109-1_NEX 7230,5725 r0 bottom (schematic designator U4)

## Footprints (in the part's own frame and the unit in brackets; to place one, negate y for a bottom-side part, rotate by r counter-clockwise, add the part's x,y. Pads: shape width x height; smd on the part's side, far side on the other; paste and mask are expansions set on the pad)
HDR1X1_SOP [mil]
  rect 60x120 smd: 1(0,0)
  silkscreen extent -50,-75 50,75
HDR1X4_SOP [mil]
  rect 60x120 smd: 1(0,0) 2(100,0) 3(200,0) 4(300,0)
  silkscreen extent -50,-75 350,75
LED_0805_RED [mil]
  rrect50% 24x50 smd: 1(-36,0) 2(36,0)
  silkscreen extent -12,-24 12,24, body extent -40,-25 40,25, height 43
RES_0805 [mil]
  rrect50% 24x50 smd: 1(-36,0) 2(36,0)
  silkscreen extent -12,-24 12,24, body extent -39,-25 39,25, height 24
SOT109-1_NEX [mil]
  rect 67x21 smd paste+0 mask+0: 1(-102.5,175) 2(-102.5,125) 3(-102.5,75) 4(-102.5,25) 5(-102.5,-25) 6(-102.5,-75) 7(-102.5,-125) 8(-102.5,-175) 9(102.5,-175) 10(102.5,-125) 11(102.5,-75) 12(102.5,-25) 13(102.5,25) 14(102.5,75) 15(102.5,125) 16(102.5,175)
  silkscreen extent -84,-202 84,202, body extent -122,-197 122,197, height 69

## Part data
D1 D1_1 D1_1_1 D1_1_2 D1_1_3 D2 D2_1 D2_1_1 D2_1_2 D2_1_3 D3 D3_1 D3_1_1 D3_1_2 D3_1_3 D4 D4_1 D4_1_1 D4_1_2 D4_1_3 D5 D5_1 D5_1_1 D5_1_2 D5_1_3 D6 D6_1 D6_1_1 D6_1_2 D6_1_3 D7 D7_1 D7_1_1 D7_1_2 D7_1_3 D8 D8_1 D8_1_1 D8_1_2 D8_1_3 D9 D9_1 D9_1_1 D9_1_2 D9_1_3 D10 D10_1 D10_1_1 D10_1_2 D10_1_3 D11 D11_1 D11_1_1 D11_1_2 D11_1_3 D12 D12_1 D12_1_1 D12_1_2 D12_1_3 D13 D13_1 D13_1_1 D13_1_2 D13_1_3 D14 D14_1 D14_1_1 D14_1_2 D14_1_3 D15 D15_1 D15_1_1 D15_1_2 D15_1_3 D16 D16_1 D16_1_1 D16_1_2 D16_1_3 D17 D17_1 D17_1_1 D17_1_2 D17_1_3 D18 D18_1 D18_1_1 D18_1_2 D18_1_3 D19 D19_1 D19_1_1 D19_1_2 D19_1_3 D20 D20_1 D20_1_1 D20_1_2 D20_1_3 D21 D21_1 D21_1_1 D21_1_2 D21_1_3 D22 D22_1 D22_1_1 D22_1_2 D22_1_3 D23 D23_1 D23_1_1 D23_1_2 D23_1_3 D24 D24_1 D24_1_1 D24_1_2 D24_1_3 D25 D25_1 D25_1_1 D25_1_2 D25_1_3 D26 D26_1 D26_1_1 D26_1_2 D26_1_3 D27 D27_1 D27_1_1 D27_1_2 D27_1_3 D28 D28_1 D28_1_1 D28_1_2 D28_1_3 D29 D29_1 D29_1_1 D29_1_2 D29_1_3 D30 D30_1 D30_1_1 D30_1_2 D30_1_3 D31 D31_1 D31_1_1 D31_1_2 D31_1_3 D32 D32_1 D32_1_1 D32_1_2 D32_1_3: library part LED_0805, "LED"
P1 P1_1 P1_1_1 P1_1_2 P1_1_3 P2 P2_1 P2_1_1 P2_1_2 P2_1_3: "Header, 4-Pin"
P3 P3_1 P3_1_1 P3_1_2 P3_1_3 P4 P4_1 P4_1_1 P4_1_2 P4_1_3 P5 P5_1 P5_1_1 P5_1_2 P5_1_3 P6 P6_1 P6_1_1 P6_1_2 P6_1_3: "Header, 1-Pin"
R1 R1_1 R1_1_1 R1_1_2 R1_1_3 R2 R2_1 R2_1_1 R2_1_2 R2_1_3 R3 R3_1 R3_1_1 R3_1_2 R3_1_3 R4 R4_1 R4_1_1 R4_1_2 R4_1_3 R5 R5_1 R5_1_1 R5_1_2 R5_1_3 R6 R6_1 R6_1_1 R6_1_2 R6_1_3 R7 R7_1 R7_1_1 R7_1_2 R7_1_3 R8 R8_1 R8_1_1 R8_1_2 R8_1_3 R9 R9_1 R9_1_1 R9_1_2 R9_1_3 R10 R10_1 R10_1_1 R10_1_2 R10_1_3 R11 R11_1 R11_1_1 R11_1_2 R11_1_3 R12 R12_1 R12_1_1 R12_1_2 R12_1_3 R13 R13_1 R13_1_1 R13_1_2 R13_1_3 R14 R14_1 R14_1_1 R14_1_2 R14_1_3 R15 R15_1 R15_1_1 R15_1_2 R15_1_3 R16 R16_1 R16_1_1 R16_1_2 R16_1_3 R17 R17_1 R17_1_1 R17_1_2 R17_1_3 R18 R18_1 R18_1_1 R18_1_2 R18_1_3 R19 R19_1 R19_1_1 R19_1_2 R19_1_3 R20 R20_1 R20_1_1 R20_1_2 R20_1_3 R21 R21_1 R21_1_1 R21_1_2 R21_1_3 R22 R22_1 R22_1_1 R22_1_2 R22_1_3 R23 R23_1 R23_1_1 R23_1_2 R23_1_3 R24 R24_1 R24_1_1 R24_1_2 R24_1_3 R25 R25_1 R25_1_1 R25_1_2 R25_1_3 R26 R26_1 R26_1_1 R26_1_2 R26_1_3 R27 R27_1 R27_1_1 R27_1_2 R27_1_3 R28 R28_1 R28_1_1 R28_1_2 R28_1_3 R29 R29_1 R29_1_1 R29_1_2 R29_1_3 R30 R30_1 R30_1_1 R30_1_2 R30_1_3 R31 R31_1 R31_1_1 R31_1_2 R31_1_3 R32 R32_1 R32_1_1 R32_1_2 R32_1_3: library part Res_0805, "Resistor"
U1 U1_1 U1_1_1 U1_1_2 U1_1_3 U2 U2_1 U2_1_1 U2_1_2 U2_1_3 U3 U3_1 U3_1_1 U3_1_2 U3_1_3 U4 U4_1 U4_1_1 U4_1_2 U4_1_3: "No Description Available"

## Via types
v1: diameter 15, hole 10, Top Layer to Bottom Layer, 340 vias

## Nets (pads, with @x,y where several pads share a name; then routed paths per layer and width w, separated by ;. In a path a pad name is that pad's centre, name@x,y a point inside that pad or via, vN(x,y) a via of type N, cw(c..) or ccw(c..) an arc to the next point about the centre after c; other vN are vias at no path point)
BITOUT_A: U1.9 U2.14 | length 722.4
  Bottom Layer w15: U1.9@5252.5,3500 5210,3500 5190,3520 5190,4030 ; 5190,4030 5210,4050 ; 5190,4030 5210,4050 ; 5210,4050 U2.14@5252.5,4050 5210,4050
BITOUT_B: U2.9 U3.14 | length 793.1
  Bottom Layer w15: U2.9@5252.5,4300 5210,4300 5190,4320 5190,4830 ; 5190,4830 5210,4850 ; 5190,4830 5210,4850 ; 5190,4830 5210,4850 ; 5210,4850 U3.14@5252.5,4850 ; 5210,4850 U3.14@5252.5,4850 ; 5210,4850 U3.14@5252.5,4850
BITOUT_C: U3.9 U4.14 | length 722.4
  Bottom Layer w15: U4.14@5252.5,5650 5210,5650 5190,5630 5190,5120 ; 5190,5120 5210,5100 ; 5190,5120 5210,5100 ; 5210,5100 U3.9@5252.5,5100 5210,5100
BITOUT_D: P2.4 U4.9 | length 169.7
  Bottom Layer w15: U4.9@5252.5,5900 5252.5,5972.5 5300,6020 P2.4@5300,6050
BITSCLK: P1.1 P2.1 U1.11 U2.11 U3.11 U4.11 | length 3688.2
  Top Layer w15: v1(5115,3425) v1(5200,3425) ; v1(5115,4225) v1(5200,4225) ; v1(5115,5025) v1(5200,5025) ; v1(5115,5825) v1(5200,5825)
  Bottom Layer w15: P1.1@5000,3000 5000,3075 5025,3100 5075,3100 5075,3100.36 5115,3140.36 v1(5115,4225) v1(5115,5025) v1(5115,5825) 5115,5915 5080,5950 5025,5950 5000,5975 P2.1@5000,6050 ; v1(5200,3425) U1.11@5225,3400 ; v1(5200,4225) U2.11@5225,4200 ; v1(5200,5025) U3.11@5225,5000 ; v1(5200,5825) U4.11@5225,5800
DATAINPUT: P1.4 U1.14 | length 440.6
  Bottom Layer w15: P1.4@5300,3000 5300,3070 5270,3100 5230,3100 5190,3140 5190,3230 ; 5190,3230 5210,3250 ; 5190,3230 5210,3250 ; 5210,3250 U1.14@5252.5,3250 5210,3250
GND: P4.1 P6.1 R1.2 R2.2 R3.2 R4.2 R5.2 R6.2 R7.2 R8.2 R9.2 R10.2 R11.2 R12.2 R13.2 R14.2 R15.2 R16.2 R17.2 R18.2 R19.2 R20.2 R21.2 R22.2 R23.2 R24.2 R25.2 R26.2 R27.2 R28.2 R29.2 R30.2 R31.2 R32.2 U1.8 U2.8 U3.8 U4.8 | length 4002
  Top Layer w15: v1(5070,3525) 5241,3525 ; v1(5070,4325) 5241,4325 ; v1(5070,5125) 5241,5125 ; v1(5070,5925) 5241,5925
  Top Layer w20: R9.2@5241,4475 R10.2@5241,4375 5241,4325 R11.2@5241,4275 R12.2@5241,4175 R13.2@5241,4075 R14.2@5241,3975 R15.2@5241,3875 R16.2@5241,3775 R1.2@5241,3675 R2.2@5241,3575 5241,3525 R3.2@5241,3475 R4.2@5241,3375 R5.2@5241,3275 R6.2@5241,3175 R7.2@5241,3075 R8.2@5241,2975 P6.1@5300,2975 ; R24.2@5241,4575 R23.2@5241,4675 R22.2@5241,4775 R21.2@5241,4875 R20.2@5241,4975 R19.2@5241,5075 5241,5125 R18.2@5241,5175 R17.2@5241,5275 R32.2@5241,5375 R31.2@5241,5475 R30.2@5241,5575 R29.2@5241,5675 R28.2@5241,5775 R27.2@5241,5875 5241,5925 R26.2@5241,5975 R25.2@5241,6075 P4.1@5300,6075 ; R9.2@5243,4475 R24.2@5243,4575
  Bottom Layer w15: U1.8@5070,3500 v1(5070,3525) ; U2.8@5070,4300 v1(5070,4325) ; U3.8@5070,5100 v1(5070,5125) ; U4.8@5070,5900 v1(5070,5925)
MEMSCLK: P1.2 P2.2 U1.12 U2.12 U3.12 U4.12 | length 3464.6
  Top Layer w15: v1(5140,3325) v1(5200,3325) ; v1(5140,4125) v1(5200,4125) ; v1(5140,4925) v1(5200,4925) ; v1(5140,5725) v1(5200,5725)
  Bottom Layer w15: P1.2@5100,3000 5100,3090 5140,3130 v1(5140,4125) v1(5140,4925) v1(5140,5725) 5140,5930 5100,5970 P2.2@5100,6050 ; v1(5200,3325) U1.12@5225,3350 ; v1(5200,4125) U2.12@5225,4150 ; v1(5200,4925) U3.12@5225,4950 ; v1(5200,5725) U4.12@5225,5750
NetD1_1: D1.1 R1.1 | length 39
  Top Layer w15: D1.1@5130,3675 R1.1@5169,3675
NetD2_1: D2.1 R2.1 | length 39
  Top Layer w15: D2.1@5130,3575 R2.1@5169,3575
NetD3_1: D3.1 R3.1 | length 39
  Top Layer w15: D3.1@5130,3475 R3.1@5169,3475
NetD4_1: D4.1 R4.1 | length 39
  Top Layer w15: D4.1@5130,3375 R4.1@5169,3375
NetD5_1: D5.1 R5.1 | length 39
  Top Layer w15: D5.1@5130,3275 R5.1@5169,3275
NetD6_1: D6.1 R6.1 | length 39
  Top Layer w15: D6.1@5130,3175 R6.1@5169,3175
NetD7_1: D7.1 R7.1 | length 39
  Top Layer w15: D7.1@5130,3075 R7.1@5169,3075
NetD8_1: D8.1 R8.1 | length 39
  Top Layer w15: D8.1@5130,2975 R8.1@5169,2975
NetD9_1: D9.1 R9.1 | length 39
  Top Layer w15: D9.1@5130,4475 R9.1@5169,4475
NetD10_1: D10.1 R10.1 | length 39
  Top Layer w15: D10.1@5130,4375 R10.1@5169,4375
NetD11_1: D11.1 R11.1 | length 39
  Top Layer w15: D11.1@5130,4275 R11.1@5169,4275
NetD12_1: D12.1 R12.1 | length 39
  Top Layer w15: D12.1@5130,4175 R12.1@5169,4175
NetD13_1: D13.1 R13.1 | length 39
  Top Layer w15: D13.1@5130,4075 R13.1@5169,4075
NetD14_1: D14.1 R14.1 | length 39
  Top Layer w15: D14.1@5130,3975 R14.1@5169,3975
NetD15_1: D15.1 R15.1 | length 39
  Top Layer w15: D15.1@5130,3875 R15.1@5169,3875
NetD16_1: D16.1 R16.1 | length 39
  Top Layer w15: D16.1@5130,3775 R16.1@5169,3775
NetD17_1: D17.1 R17.1 | length 39
  Top Layer w15: D17.1@5130,5275 R17.1@5169,5275
NetD18_1: D18.1 R18.1 | length 39
  Top Layer w15: D18.1@5130,5175 R18.1@5169,5175
NetD19_1: D19.1 R19.1 | length 39
  Top Layer w15: D19.1@5130,5075 R19.1@5169,5075
NetD20_1: D20.1 R20.1 | length 39
  Top Layer w15: D20.1@5130,4975 R20.1@5169,4975
NetD21_1: D21.1 R21.1 | length 39
  Top Layer w15: D21.1@5130,4875 R21.1@5169,4875
NetD22_1: D22.1 R22.1 | length 39
  Top Layer w15: D22.1@5130,4775 R22.1@5169,4775
NetD23_1: D23.1 R23.1 | length 39
  Top Layer w15: D23.1@5130,4675 R23.1@5169,4675
NetD24_1: D24.1 R24.1 | length 39
  Top Layer w15: D24.1@5130,4575 R24.1@5169,4575
NetD25_1: D25.1 R25.1 | length 39
  Top Layer w15: D25.1@5130,6075 R25.1@5169,6075
NetD26_1: D26.1 R26.1 | length 39
  Top Layer w15: D26.1@5130,5975 R26.1@5169,5975
NetD27_1: D27.1 R27.1 | length 39
  Top Layer w15: D27.1@5130,5875 R27.1@5169,5875
NetD28_1: D28.1 R28.1 | length 39
  Top Layer w15: D28.1@5130,5775 R28.1@5169,5775
NetD29_1: D29.1 R29.1 | length 39
  Top Layer w15: D29.1@5130,5675 R29.1@5169,5675
NetD30_1: D30.1 R30.1 | length 39
  Top Layer w15: D30.1@5130,5575 R30.1@5169,5575
NetD31_1: D31.1 R31.1 | length 39
  Top Layer w15: D31.1@5130,5475 R31.1@5169,5475
NetD32_1: D32.1 R32.1 | length 39
  Top Layer w15: D32.1@5130,5375 R32.1@5169,5375
OUTENABLE: P1.3 P2.3 U1.13 U2.13 U3.13 U4.13 | length 3429
  Bottom Layer w15: 5165,3300 U1.13@5252.5,3300 ; 5165,4100 U2.13@5252.5,4100 ; 5165,4900 U3.13@5252.5,4900 ; P1.3@5200,3000 5200,3090 5165,3125 5165,5700 ; P2.3@5200,6050 5200,5970 5165,5935 5165,5700 ; U4.13@5252.5,5700 5165,5700
Q_A0: D8.2 U1.15 | length 371.1
  Top Layer w10: D8.2@5065,2995 5095,3025 5190,3025 5205,3040 5205,3210 v1(5215,3220)
  Bottom Layer w10: v1(5215,3220) U1.15@5235,3200
Q_A1: D7.2 U1.1 | length 158.7
  Top Layer w10: v1(5000,3150) 5020,3150 5059,3111 D7.2@5059,3075
  Bottom Layer w15: v1(5000,3150) U1.1@5047.5,3150
Q_A2: D6.2 U1.2 | length 116.9
  Top Layer w10: v1(5000,3200) 5025,3175 D6.2@5059,3175
  Bottom Layer w15: v1(5000,3200) U1.2@5047.5,3200